# Altium PCB NOT.PcbDoc
Units mm, origin at the board's own origin, x right, y up, seen from the top; angles counter-clockwise.
Board outline 15 x 15 mm, 2 copper layers (Top Layer, Bottom Layer), stack 1.535 mm thick; 11 components, 6 nets, 26 pads, 3 vias.
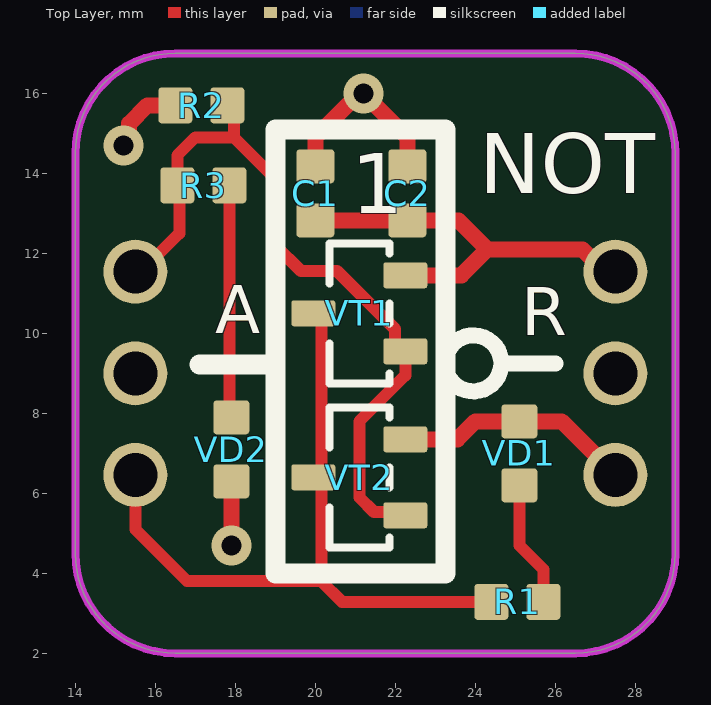
[diagram p0: Top Layer view]
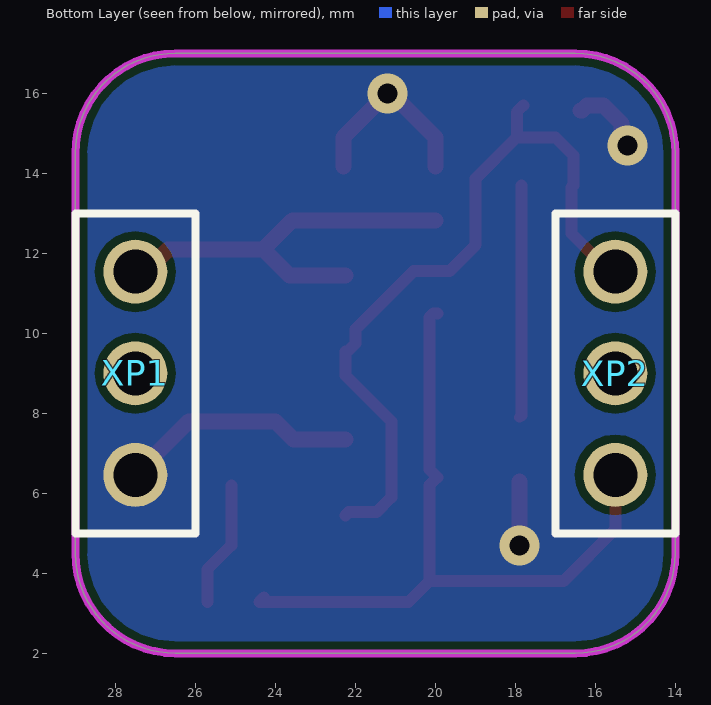
[diagram p1: Bottom Layer view, seen from below]
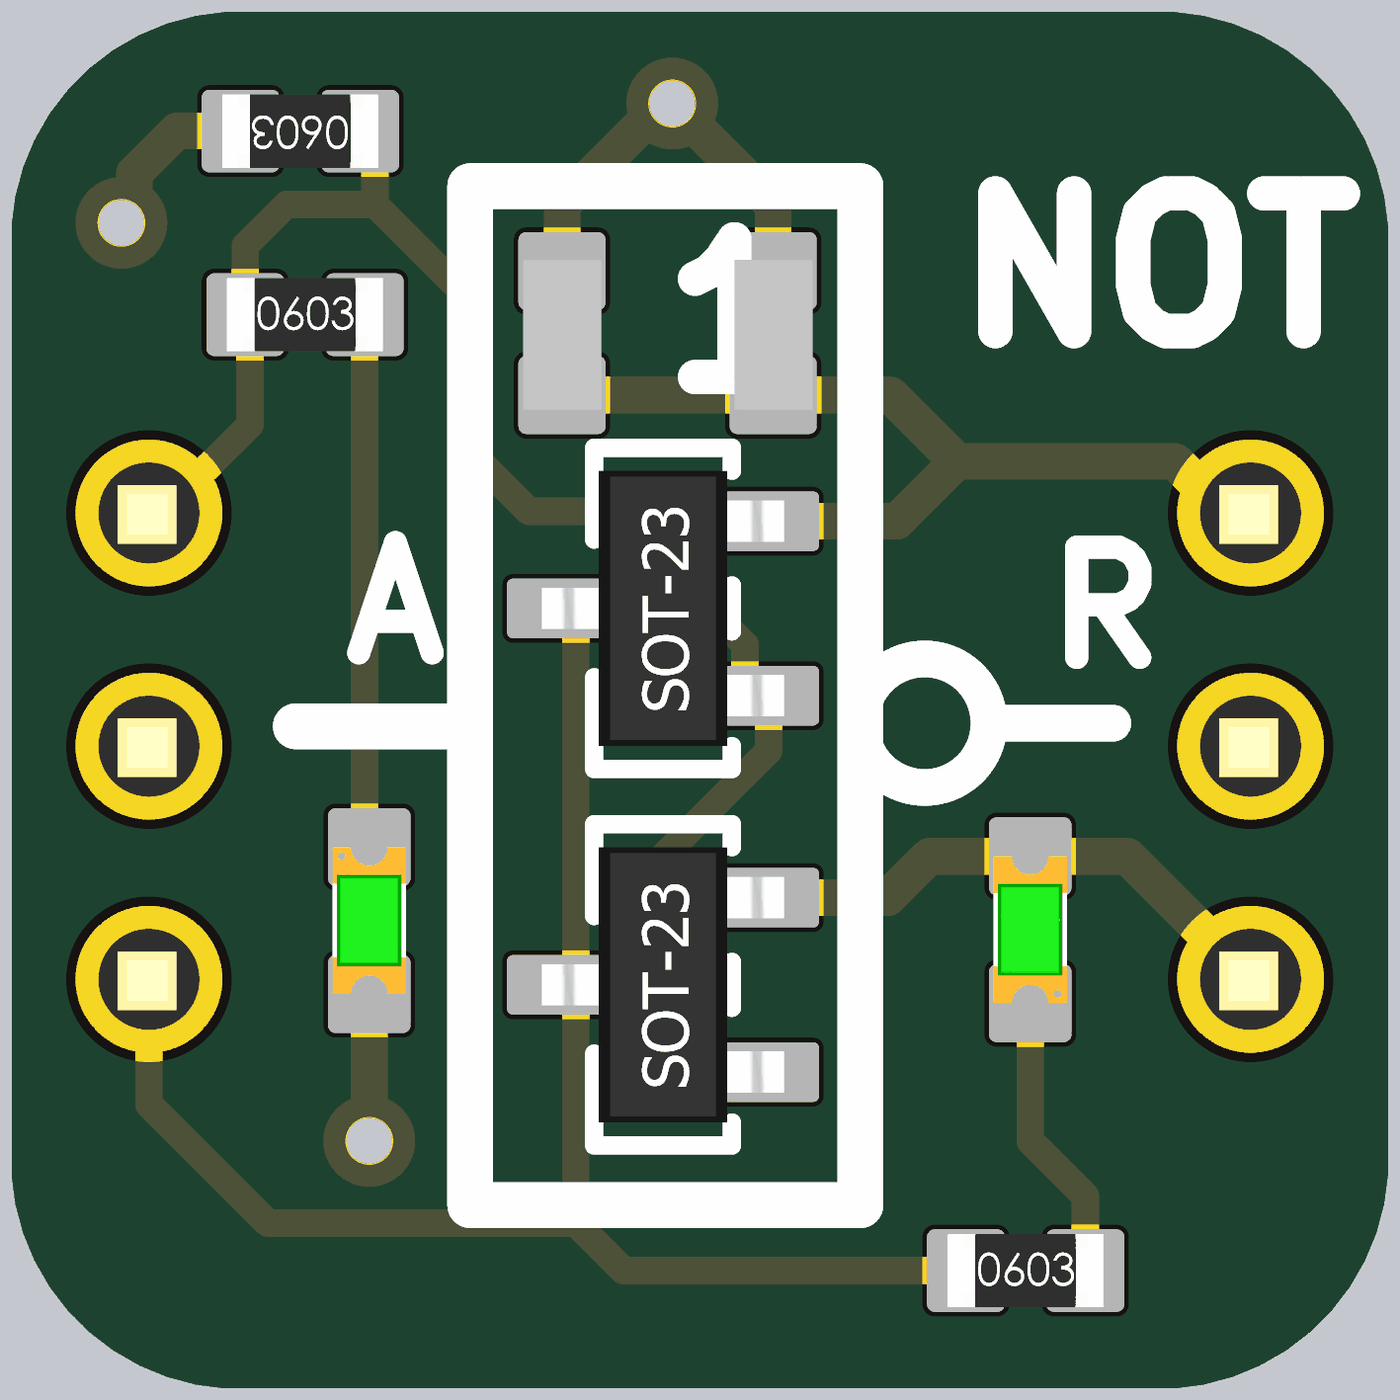
[diagram p2: 3D render of the assembled board from above, using the file's embedded part models]

## Layer stack, top to bottom
Top Solder: solder mask 0.01, Solder Resist, Dk 3.5
Top Layer: signal copper 0.018
Dielectric 1: dielectric 1.499, FR-4, Dk 4.3
Bottom Layer: signal copper 0.018
Bottom Solder: solder mask 0.01, Solder Resist, Dk 3.5

## Board outline
14,4.5 ccw(c16.5,4.5) 16.5,2 26.5,2 ccw(c26.5,4.5) 29,4.5 29,14.5 ccw(c26.5,14.5) 26.5,17 16.5,17 ccw(c16.5,14.5) 14,14.5

## Design rules (kind name [scope] priority, off if disabled: settings)
Clearance [All] p1: gap=0.2 ignorepadtopadclearanceinfootprint=FALSE
PolygonConnect PolygonConnect_isVia [All] p1: thpad.connectstyle=Direct thpad.reliefconductorwidth=0.254 thpad.reliefentries=4 thpad.polygonreliefangle="90 Angle" thpad.airgapwidth=0.254 smdpad.connectstyle=Relief smdpad.reliefconductorwidth=0.254 smdpad.reliefentries=4 smdpad.polygonreliefangle="90 Angle" smdpad.airgapwidth=0.254 via.connectstyle=Direct via.reliefconductorwidth=0.254 via.reliefentries=4 via.polygonreliefangle="90 Angle" via.airgapwidth=0.254
PolygonConnect [All] p2: connectstyle=Relief reliefconductorwidth=0.254 reliefentries=4 polygonreliefangle="90 Angle" airgapwidth=0.254
RoutingVias [All] p1: holewidth=0.711 width=1.27 viastyle="Through Hole" minholewidth=0.711 minwidth=1.27 maxholewidth=0.711 maxwidth=1.27
SolderMaskExpansion [All] p1: expansion=0.102 istentingtop=FALSE
Width [All] p1: maxlimit=0.254 minlimit=0.254 preferedwidth=0.254
30 further rules are at their usual default settings.

## Components (designator, comment, footprint, x,y, rotation, side; value= is the part's Value field where it differs from the comment)
C1 "0,1 мкФ ±* * * *, *" K10-79_1.6_0.8(0603) 20,13.5 r270 top value="0,1 мк"
C2 "0,01 мкФ ±* * * *, *" K10-79_1.6_0.8(0603) 22.3,13.5 r270 top value="0,01 мк"
R1 "1 кОм ±5 % 0603, RC0603JR-071KL" P1-12-0.1(0603) 25.05,3.287 r0 top value="1 к"
R2 "1 МОм ±5 % 0603, RC0603JR-071KL" P1-12-0.1(0603) 17.15,15.7 r180 top value="1 М"
R3 "1 кОм ±5 % 0603, RC0603JR-071KL" P1-12-0.1(0603) 17.2,13.7 r0 top value="1 к"
VD1 "VD - Светодиод" "LED 0603" 25.1,7 r90 top value=GNL-0805UBC-TL
VD2 "VD - Светодиод" "LED 0603" 17.9,7.1 r270 top value=GNL-0805UBC-TL
VT1 "VT - Полевой транзистор P канал (MOSFET_P)" SOT23(KT-46) 21.1,10.5 r90 top
VT2 "VT - Полевой транзистор N канал (MOSFET_N)" SOT23(KT-46) 21.1,6.4 r90 top
XP1 "Вилка PLL1.27-1x3 RUICHI" PCBComponent_1 27.5,9 r0 bottom value=PLL1.27-1x3
XP2 "KONT_POLE_POWER" PCBComponent_1 15.5,9 r0 bottom value=PLL1.27-1x3

## Footprints (in the part's own frame and the unit in brackets; to place one, negate y for a bottom-side part, rotate by r counter-clockwise, add the part's x,y. Pads: shape width x height; smd on the part's side, far side on the other; paste and mask are expansions set on the pad)
K10-79_1.6_0.8(0603) [mm]
  rrect20% 0.85x0.95 smd mask+0.05: 1(-0.675,0) 2(0.675,0)
  body extent -0.8,-0.42 0.84,0.43, height 0.41
"LED 0603" [mm]
  rrect20% 0.85x0.9 smd mask+0.05: 1(-0.8,0) 2(0.8,0)
  body extent -0.8,-0.4 0.8,0.4, height 0.6
P1-12-0.1(0603) [mm]
  rrect20% 0.85x0.9 smd mask+0.05: 1(-0.65,0) 2(0.65,0)
  Top Layer pour cut-out: -0.225,0.4 0.225,0.4 0.225,-0.4 -0.225,-0.4
  body extent -0.85,-0.4 0.85,0.4, height 0.56
PCBComponent_1 [mm]
  round 1.6 hole 1.1: 1(0,-2.54) 2(0,0) 3(0,2.54)
  silkscreen extent -1.5,-4 1.5,4, body extent -1.29,-3.8 1.25,3.82, height 8.54
SOT23(KT-46) [mm]
  rrect20% 0.65x1.1 smd mask+0.05: 1(-0.95,-1.15) 2(0.95,-1.15) 3(0,1.15)
  silkscreen extent -1.75,-0.75 1.75,0.75, body extent -1.5,-1.32 1.5,1.32, height 1.08

## Part data
C1 C2: library part "C - Конденсатор"
R1 R2 R3: library part "R - Резистор", Package=0603, PartNumber=RC0603JR-071KL, Tolerance="5 %", Company=Yageo
VD1 VD2: Package=0603, PartNumber=GNL-0805UBC-TL, Company=G-nor
VT1 VT2: "VT"
XP1 XP2: library part "X - Контактное поле х3", PartNumber=PLL1.27-1x3, 2=-, Company=RUICHI
  XP1: 1=Питание, 3=Общий
  XP2: 1="Вход 1", 3=Выход

## Via types
v1: diameter 1, hole 0.5, Top Layer to Bottom Layer, tented both sides, 3 vias

## Nets (pads, with @x,y where several pads share a name; then routed paths per layer and width w, separated by ;. In a path a pad name is that pad's centre, name@x,y a point inside that pad or via, vN(x,y) a via of type N, cw(c..) or ccw(c..) an arc to the next point about the centre after c; other vN are vias at no path point)
A_IN: R2.1 R3.1 VT1.1 VT2.1 XP2.1 | length 19.1
  Top Layer w0.3: XP2.1 15.64,11.54 16.6,12.5 16.6,13.65 R3.1 16.55,14.45 17,14.9 17.961,14.9 ; R2.1 17.961,15.539 17.961,14.9 ; VT2.1 22.168,5.532 21.468,5.532 21.1,5.9 21.1,7.8 22.25,8.95 VT1.1 22.191,9.55 21.993,9.748 21.993,10.107 20.541,11.559 19.641,11.559 18.995,12.205 18.995,13.866 17.961,14.9
GND: C1.1 C2.1 R2.2 VD1.2 VD2.2 VT2.2 XP1.3 | length 14.1
  Top Layer w0.4: v1(15.2,14.7) 15.343,14.843 15.343,15.242 15.801,15.7 16.202,15.7 16.331,15.571 R2.2@16.371,15.571 ; v1(17.9,4.7) VD2.2 ; C1.1 20,14.9 21.1,16 v1(21.2,16) 22.3,14.9 C2.1 ; VT2.2 23.55,7.35 24,7.8 26.16,7.8 XP1.3
NetR1_2: R1.2 VD1.1 | length 3.2
  Top Layer w0.3: VD1.1 25.1,4.7 25.7,4.1 25.7,3.313 R1.2
NetR3_2: R3.2 VD2.1 | length 5.8
  Top Layer w0.254: VD2.1@17.85,7.95 VD2.1
  Top Layer w0.3: VD2.1@17.85,7.95 R3.2
R_OUT: R1.1 VT1.3 VT2.3 XP2.3 | length 18.2
  Top Layer w0.3: XP2.3 15.5,5.1 16.795,3.805 20.15,3.805 ; VT2.3 VT2.3@19.952,6.4 ; VT1.3 20.05,10.5 20.15,10.4 20.15,6.598 VT2.3@19.952,6.4 ; R1.1@24.288,3.4 R1.1 20.668,3.288 20.15,3.805 ; VT2.3@19.952,6.4 20.15,6.202 20.15,3.805
Vdd: C1.2 C2.2 VT1.2 XP1.1 | length 10.4
  Top Layer w0.4: C1.2 C2.2 23.575,12.825 24.3,12.1 ; VT1.2 22.45,11.45 23.65,11.45 24.3,12.1 ; XP1.1 27.238,11.54 26.678,12.1 24.3,12.1
pads on no net: XP1.2 XP2.2

## Polygon pours and split planes (outlines as drawn)
GND on Bottom Layer "GND_L02_P005" (solid, remove dead copper, pour order 5): 11.609,14.835 cw(c14.149,14.835) 14.149,17.375 42.851,17.375 cw(c42.851,14.835) 45.391,14.835 45.391,4.04 cw(c42.851,4.04) 42.851,1.5 14.149,1.5 cw(c14.149,4.04) 11.609,4.04

## Keep-outs
Keep-Out Layer:
  the board outline again, w0.2

## Silkscreen, mask and mechanical layers (free items; w line width, h text height)
Top Overlay:
  circle w0.4: c23.95,9.25 r0.7
  lines w0.4: 24.65,9.25 26,9.25
  lines w0.5: 17.1,9.216 19,9.216 ; 19,4 19,10 19,15.1 23.25,15.1 23.25,4 19,4
  text "NOT" at 24.1,13.5 h1.5
  text "1" at 20.9,13 h1.5
  text "A" at 17.504,10.004 h1.2
  text "R" at 25.154,9.954 h1.2
Mechanical 1:
  the board outline again, w0.15
Mechanical 5:
  lines w0.1: 21.204,12.7 21.75,12.7 ; 27.925,10.2 28.3,10.2
  lines w0.2: 5,11.5 5.04,11.54 40.5,11.54

## Dimensions
41,17 to 27.5,11.54 on Mechanical 5
15.5,11.54 to 27.5,11.54 on Mechanical 5